# Altium PCB PCB.PcbDoc (part 2 of 2)
Units mil, origin at the board's own origin, x right, y up, seen from the top; angles counter-clockwise.
Board outline 2500 x 3180 mil, 4 copper layers (Top Layer, Mid Layer 1, Mid Layer 2, Bottom Layer), stack 61.811 mil thick; 134 components, 109 nets, 471 pads, 126 vias.
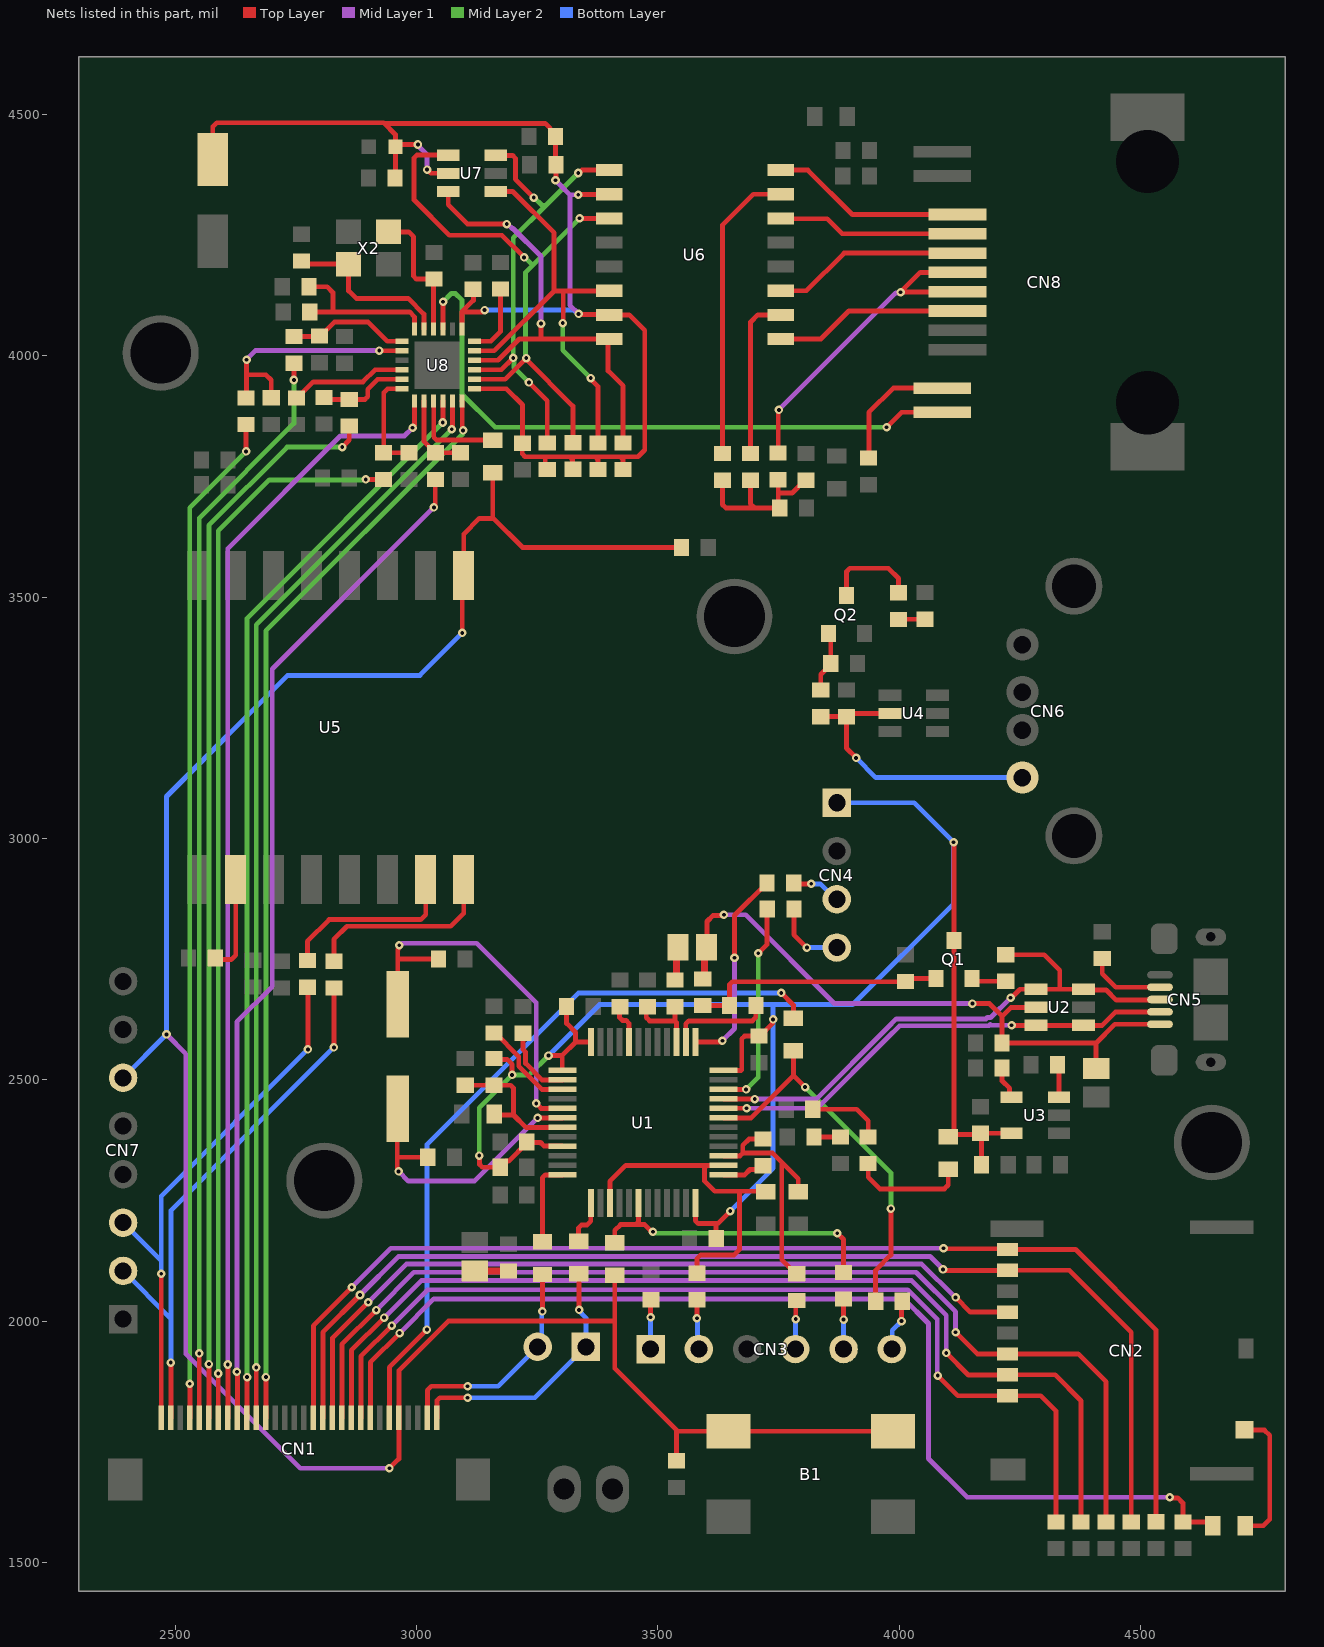
[diagram p4: the nets of this part, all layers, seen from the top]

## Via types
v1: diameter 17.72, hole 7.87, Top Layer to Bottom Layer, 123 vias
v2: diameter 25.98, hole 12.99, Top Layer to Bottom Layer, 2 vias
v3: diameter 50, hole 28, Top Layer to Bottom Layer, 1 vias

## Nets (pads, with @x,y where several pads share a name; then routed paths per layer and width w, separated by ;. In a path a pad name is that pad's centre, name@x,y a point inside that pad or via, vN(x,y) a via of type N, cw(c..) or ccw(c..) an arc to the next point about the centre after c; other vN are vias at no path point) (continued)
NetC4_1: C4.1 U3.3 | length 68.5
  Top Layer w10: C4.1@4328.56,2531.16 4331.52,2528.19 U3.3@4331.52,2463.93
NetC5_2: C5.2 U3.4 | length 68.9
  Top Layer w10: C5.2@4213.56,2524.75 4213.56,2497.44 4229,2482 4229,2468.03 U3.4@4233.1,2463.93
NetC8_1: C8.1 U1.5 X1.2 | length 811.4
  Top Layer w10: X1.2@2961,2656.41 2961,2769.87 2962.9,2771.78 2962.9,2777.23 v1(2964.38,2778.71) ; 2962.09,2750 C8.1@3045.44,2750 ; v1(3248.09,2451) 3258.33,2440.76 U1.5@3302.82,2440.76
  Mid Layer 1 w10: v1(2964.38,2778.71) 2966.47,2778.71 2970.76,2783 3125,2783 3248.09,2659.91 v1(3248.09,2451)
NetC9_2: C9.2 R12.1 SB2.2 U1.7 | length 311.5
  Top Layer w10: C9.2@3101,2488.73 R12.1@3161,2488.73 3195.14,2488.73 3201,2482.88 3201,2427 ; SB2.2@3161.08,2429.14 3163.22,2427 3201,2427 ; U1.7@3302.82,2401.39 3226.61,2401.39 3201,2427
NetC10_1: C10.1 U1.6 X1.1 | length 597.6
  Top Layer w10: X1.1@2961,2439.88 2960,2438.88 2960,2340 ; v1(2962.83,2310.17) 2960,2313 2960,2340 ; C10.1@3023.44,2339.4 2960.6,2339.4 2960,2340 ; v1(3251.01,2421.08) U1.6@3302.82,2421.08
  Mid Layer 1 w10: v1(2962.83,2310.17) 2983,2290 3119.94,2290 v1(3251.01,2421.08)
NetC18_2: C18.2 U8.4 X2.3 | length 286.3
  Top Layer w10: X2.3@2942,4257 2984,4257 2994,4247 2994,4164.86 2999.86,4159 C18.2@3036,4159 3035.16,4158.16 U8.4@3035.16,4055.8
NetC19_2: C19.2 U8.5 X2.1 | length 362.4
  Top Layer w10: C19.2@2762,4196.88 2768.81,4190.07 X2.1@2859.32,4190.07 2859.32,4134.68 2875,4119 2983,4119 3015.47,4086.53 U8.5@3015.47,4055.8
NetC20_1: C20.1 C21.1 U8.6 | length 341.3
  Top Layer w10: C20.1@2777,4143.25 2814.75,4143.25 2827,4131 2827,4091 ; C21.1@2779,4091 2827,4091 ; U8.6@2995.79,4055.8 2995.79,4081.21 2986,4091 2827,4091
NetC23_1: C23.1 C24.1 C25.1 C26.1 C27.1 C28.2 L1.1 R53.2 R54.2 R55.2 R56.2 U6.2 U6.7 U7.5 U8.1 U8.19 | length 2877.3
  Top Layer w10: C25.1@2578,4406.65 2578,4475 2586,4483 2932,4483 2956.5,4458.5 L1.1@2956.5,4433 ; 2933.28,4481.72 3266.91,4481.72 3277.25,4471.37 3277.25,4465.75 C26.1@3288,4455 3288,4397 C27.1@3289,4396 3289,4365 v1(3288,4364) ; C28.2@2955.56,4369 2956.5,4369.94 L1.1@2956.5,4433 ; v1(3003,4438) 2961.5,4438 L1.1@2956.5,4433 ; v1(3022,4386) 3029.5,4378.5 3065.29,4378.5 U7.5@3065.79,4378 ; U8.1@3094.21,4055.8 3094.21,4091.21 ; C23.1@3117,4138 3118,4137 3118,4115 3094.21,4091.21 ; U8.19@3119.8,3931.79 3186.21,3931.79 3219.75,3898.25 C24.1@3219.75,3819 3219,3818.25 3219,3796.86 3224.86,3791 3265.14,3791 ; v1(3141,4095) 3137.21,4091.21 3094.21,4091.21 ; R56.2@3271,3764.44 3266.81,3768.63 3266.81,3789.33 3265.14,3791 ; R55.2@3324,3764.88 3323,3765.88 3323,3785.14 3317.14,3791 ; v1(3335,4334) 3335.5,4334.5 3398.94,4334.5 U6.2@3399.44,4335 ; v1(3336,4087) 3337,4086 3398.44,4086 U6.7@3399.44,4085 3441,4085 3473,4053 3473,3805 3459,3791 3422.14,3791 ; R54.2@3376,3764.44 3376,3785.14 3370.14,3791 ; R53.2@3428,3764.44 3428,3785.14 3422.14,3791 ; 3265.14,3791 3317.14,3791 ; 3317.14,3791 3370.14,3791 ; 3370.14,3791 3422.14,3791
  Mid Layer 1 w10: v1(3003,4438) 3003,4435.91 3022,4416.91 v1(3022,4386) ; v1(3288,4364) 3318,4334 ; v1(3335,4334) 3318,4334 ; v1(3336,4087) 3318,4105 3318,4334
  Bottom Layer w10: v1(3141,4095) 3325.91,4095 3333.91,4087 v1(3336,4087)
NetC29_2: C29.2 R57.1 R58.1 R59.1 R60.1 | length 361.6
  Top Layer w10: R58.1@3634,3742.44 3634,3692 3641,3685 3701,3685 ; R57.1@3692.25,3742.44 3692,3742.19 3692,3694 3701,3685 ; R59.1@3749.51,3743.44 3749.51,3715.91 ; R60.1@3806.76,3742.44 3804.79,3742.44 3778.26,3715.91 3749.51,3715.91 ; 3701,3685 C29.2@3752.88,3685 3749.51,3688.37 3749.51,3715.91
NetCN2_DSW1: CN2.DSW1 SB1.1 | length 286.8
  Top Layer w10: CN2.DSW1@4715.69,1774.83 4716.51,1774 4757,1774 4768,1763 4768,1589 4755,1576 SB1.1@4717.75,1576
NetCN3_1: CN3.1 R20.2 | length 103.8
  Top Layer w10: v1(3485,2008) 3485,2043 R20.2@3486,2044
  Bottom Layer w10: CN3.1@3485,1942 3485,1949 v1(3485,2008) ; CN3.1@3486,1949 CN3.1@3487,1948
NetCN3_2: CN3.2 R19.2 | length 109.3
  Top Layer w10: v1(3581,2006) R19.2@3581,2044 R19.2@3584,2041
  Bottom Layer w10: v1(3581,2006) 3582.48,2004.52 3582.48,1949 3582.48,1944.52 CN3.2@3585,1942 ; CN3.2@3586,1949 CN3.2@3587,1948
NetCN3_4: CN3.4 R21.2 | length 102.1
  Top Layer w10: v1(3786,2004) 3786,2040.88 R21.2@3788,2042.88
  Bottom Layer w10: CN3.4@3785,1942 3785.5,1942.5 3785.5,2003.5 v1(3786,2004)
NetCN3_5: CN3.5 R22.2 | length 103.4
  Top Layer w10: v1(3885,2003) R22.2@3885,2045.44
  Bottom Layer w10: CN3.5@3885,1942 v1(3885,2003)
NetCN3_6: CN3.6 R23.2 | length 107.9
  Top Layer w10: v1(4005,2000) 4005,2039.44 R23.2@4006.56,2041
  Bottom Layer w10: CN3.6@3985,1942 3985.67,1942.67 3985.67,1980.67 v1(4005,2000)
NetCN4_3: CN4.3 R24.2 | length 104.4
  Top Layer w10: R24.2@3781.56,2908 3783.56,2906 v1(3818,2906)
  Bottom Layer w10: v1(3818,2906) 3837,2906 3870,2873 CN4.3@3871,2874
NetCN4_4: CN4.4 R25.2 | length 153.1
  Top Layer w10: R25.2@3782.12,2854 3782.12,2800.88 v1(3809,2774)
  Bottom Layer w10: v1(3809,2774) CN4.4@3871,2774
NetCN5_4: CN5.4 R30.2 | length 162.8
  Top Layer w10: R30.2@4421,2751.44 4421,2720 4449.17,2691.83 CN5.4@4540.69,2691.83
NetCN8_4: CN8.4 CN8.5 R59.2 | length 695.7
  Top Layer w10: R59.2@3749.51,3798.56 3749.51,3886.51 v1(3751,3888) ; v1(4003,4132) v1@4003.5,4132.5 ; CN8.5@4120.96,4133 4120.46,4132.5 v1@4003.5,4132.5 ; CN8.4@4120.96,4173 4044,4173 v1@4003.5,4132.5
  Mid Layer 1 w10: v1(3751,3888) 3993.52,4130.52 4001.52,4130.52 v1(4003,4132)
NetD2_2: D2.2 R7.1 | length 70
  Top Layer w15: R7.1@3535.9,2706.56 3538.69,2709.34 3538.69,2771.46 D2.2@3541.47,2774.25
NetD3_1: D3.1 SB5.1 | length 240.2
  Top Layer w10: D3.1@3936,2326.44 3936,2298 3960,2274 4094,2274 4102,2282 SB5.1@4102,2314.5
NetD3_2: D3.2 R17.1 | length 158.3
  Top Layer w10: R17.1@3821.12,2439 3912,2439 3936,2415 D3.2@3936,2381.56
NetD4_1: D4.1 R16.1 | length 55.4
  Top Layer w10: R16.1@3823.46,2381.75 3823.65,2381.56 D4.1@3878.75,2381.56
NetD5_2: D5.2 R18.2 | length 70
  Top Layer w15: D5.2@3121,2104 3121.06,2103.94 3190.94,2103.94 R18.2@3191,2103.88
NetD6_1: D6.1 R31.1 | length 55.5
  Top Layer w10: D6.1@3998.75,3453.88 3999.3,3454.44 R31.1@4054,3454.44
NetD6_2: D6.2 Q2.3 | length 199.1
  Top Layer w10: Q2.3@3891,3503.37 3891,3553 3898,3560 3978,3560 3998.75,3539.25 D6.2@3998.75,3509
NetQ1_1: Q1.1 R26.2 R27.1 R28.2 | length 531.5
  Top Layer w10: R27.1@3593.16,2654 R26.2@3648.44,2654 3648.44,2697.14 3654.3,2703 4012.12,2703 R28.2@4013,2703.88 4019.12,2710 Q1.1@4076.2,2710
NetQ1_2: Q1.2 R29.1 | length 72.5
  Top Layer w10: Q1.2@4151,2710 4157,2704 R29.1@4221,2704
NetQ2_1: Q2.1 R32.1 R33.2 | length 127.6
  Top Layer w10: R32.1@3837.75,3307.56 3837.75,3339.79 3858.44,3360.49 R33.2@3858.44,3362.45 3858.44,3419.79 Q2.1@3853.6,3424.63
NetR7_2: R7.2 R8.1 U1.39 | length 161.2
  Top Layer w10: R8.1@3478.65,2651.44 3476,2648.79 3476,2629 3483,2622 3535,2622 3535.9,2621.1 ; R7.2@3535.9,2651.44 3535.9,2621.1 ; U1.39@3538.57,2578.08 3538.57,2618.43 3535.9,2621.1
NetR9_1: R9.1 U1.44 | length 85.8
  Top Layer w10: R9.1@3421.39,2651.44 3421,2651.05 3421,2628.86 3426.86,2623 3434.29,2623 3440.15,2617.14 U1.44@3440.15,2578.08
NetR10_1: R10.1 U1.2 | length 155.7
  Top Layer w10: R10.1@3221,2596.56 3221,2562.31 3226,2557.31 3226,2533.8 3259.98,2499.82 U1.2@3302.82,2499.82
NetR11_2: R11.2 U1.3 | length 202.1
  Top Layer w10: R11.2@3161,2597.17 3162.97,2597.17 3212,2548.14 3212,2528 3259.87,2480.13 U1.3@3302.82,2480.13
NetR36_1: R36.1 U5.10 | length 204.2
  Top Layer w10: R36.1@2583,2752 2586,2749 2616,2749 2625.35,2758.35 U5.10@2625.35,2915.04
NetR39_2: R39.2 U5.15 | length 380.8
  Top Layer w10: R39.2@2774,2747 2774,2787 2819,2832 3009,2832 3019.06,2842.06 U5.15@3019.06,2915.04
NetR40_2: R40.2 U5.16 | length 412.4
  Top Layer w10: R40.2@2833,2749.56 R40.2@2829,2745.56 2829,2791 2856,2818 3071,2818 3097.8,2844.8 U5.16@3097.8,2915.04
NetR41_1: R41.1 R44.1 U8.8 | length 504.2
  Top Layer w10: R44.1@2646.73,3913 2648,3914.27 2648,3964 ; v1(2648,3992.14) 2648,3964 ; R41.1@2698.98,3913.12 2698.98,3950.02 2688,3961 2651,3961 2648,3964 ; v1(2923,4011) 2923.24,4010.76 2969.96,4010.76 U8.8@2970.2,4010.53
  Mid Layer 1 w10: v1(2648,3992.14) 2648,3993.26 2665.74,4011 v1(2923,4011)
NetR42_1: R42.1 R45.1 U8.7 | length 252.6
  Top Layer w10: R45.1@2746.49,4040 2797.75,4040 R42.1@2798.75,4041 2800.71,4041 2829.71,4070 2900,4070 2939.79,4030.21 U8.7@2970.2,4030.21
NetR43_1: R43.1 R47.1 U8.11 | length 189.7
  Top Layer w10: R43.1@2808.49,3913.7 2812.49,3909.7 R47.1@2860.75,3909.7 2893.14,3909.7 2899,3915.55 2899,3931 2919.47,3951.47 U8.11@2970.2,3951.47
NetR46_1: R46.1 U8.10 | length 243
  Top Layer w10: R46.1@2751.24,3913 2753.21,3913 2786.21,3946 2889,3946 2914.16,3971.16 U8.10@2970.2,3971.16
NetR48_1: R48.1 R49.1 U8.12 | length 218.6
  Top Layer w10: U8.12@2970.2,3931.79 2969.98,3932 2940,3932 2932,3924 R48.1@2932,3799.26 R49.1@2984.25,3799.26
NetR50_1: R50.1 R51.1 U8.14 | length 170.1
  Top Layer w10: U8.14@3015.47,3906.2 3015.47,3822.79 3026.28,3811.98 3026.28,3810.01 3037.03,3799.26 R50.1@3039,3799.26 R51.1@3091.25,3799.26
NetR52_2: R52.2 U8.24 | length 150.8
  Top Layer w10: U8.24@3119.8,4030.21 3154.21,4030.21 3174,4050 R52.2@3174,4138.44
NetR57_2: R57.2 U6.10 | length 341.1
  Top Layer w10: R57.2@3692.25,3797.56 3692.25,4070.25 3707,4085 U6.10@3754.56,4085
NetR58_2: R58.2 U6.15 | length 620.5
  Top Layer w10: R58.2@3634,3797.56 3634,4271 3698,4335 U6.15@3754.56,4335
NetSB3_2: SB3.2 U1.12 | length 177.2
  Top Layer w10: SB3.2@3261,2164.06 3261,2296.92 3266.86,2302.78 3302.64,2302.78 U1.12@3302.82,2302.97
NetSB4_2: SB4.2 U1.13 | length 96.1
  Top Layer w10: SB4.2@3336,2165.31 3336,2193.14 3341.86,2199 3353,2199 3361,2207 3361,2243.98 U1.13@3361.41,2244.38
NetSB12_2: SB12.2 U8.15 | length 199.8
  Top Layer w10: U8.15@3035.16,3906.2 3035.67,3905.69 3035.67,3831.36 3041.53,3825.5 SB12.2@3158,3825.5
NRST: B1.2 B1.3 C1.1 CN1.5 CN7.6 R34.1 SB8.2 SB12.1 U5.1 | length 4950.4
  Top Layer w10: v1(2944,1695) 2963.43,1714.43 CN1.5@2963.43,1799.4 2963.43,1897.43 3066,2000 3411,2000 ; v1(3095,3426) 3095,3542.17 U5.1@3097.8,3544.96 3097.8,3630.8 3130.35,3663.35 3156.35,3663.35 3158,3665 ; SB12.1@3158,3758 3158,3665 ; SB8.2@3411,2095.25 3411,2000 ; C1.1@3539,1710.56 3539,1774 ; R34.1@3549.44,3603 3220,3603 3158,3665 ; B1.3@3987.28,1771.58 B1.2@3646.72,1771.58 3541.42,1771.58 3539,1774 ; 3411,2000 3411,1902 3539,1774
  Mid Layer 1 w10: v1(2482,2594) 2522,2554 2522,1932 2759,1695 v1(2944,1695)
  Bottom Layer w10: CN7.6@2392,2504 v1(2482,2594) 2482,3087 2733,3338 3007,3338 v1(3095,3426)
RD_N: R53.1 U6.8 U7.6 U8.22 | length 962.8
  Top Layer w10: U7.6@3065.79,4340.6 3065.79,4313.21 3106,4273 v1(3187,4273) ; U8.22@3119.8,3990.84 3168.84,3990.84 3213,4035 3260,4035 ; v1(3258,4067) 3258,4037 3260,4035 ; U6.8@3399.44,4035 U6.8@3399,4034.56 ; R53.1@3428,3819.56 3428,3938 3397,3969 3397,4032.56 U6.8@3399,4034.56 ; 3260,4035 3398.56,4035 U6.8@3399,4034.56
  Mid Layer 1 w10: v1(3187,4273) 3189.09,4273 3198.09,4264 3200,4264 3258,4206 v1(3258,4067)
RD_P: R54.1 U6.6 U7.1 U8.23 | length 953.6
  Top Layer w10: U8.23@3119.8,4010.53 3161.2,4010.53 3285.06,4134.39 ; U7.1@3164.21,4340.6 3199.4,4340.6 3285.06,4254.94 3285.06,4134.39 ; v1(3303,4068) 3304,4069 3304,4134.39 ; v1(3361,3954) 3361,3951.91 3376,3936.91 R54.1@3376,3819.56 ; U6.6@3399.44,4135 3399.14,4134.69 3350.49,4134.69 3350.19,4134.39 3304,4134.39 ; 3285.06,4134.39 3304,4134.39
  Mid Layer 2 w10: v1(3303,4068) 3303,4012 v1(3361,3954)
RMII_CRS_DV: CN1.25 R47.2 | length 2242.5
  Top Layer w10: CN1.25@2569.72,1799.4 2569.78,1799.45 v1(2569.83,1910.83) v1(2569.83,1910.83) ; v1(2846,3811) 2860.75,3825.75 R47.2@2860.75,3854.58
  Mid Layer 2 w10: v1(2569.83,1910.83) 2569.83,3648.83 2732,3811 v1(2846,3811)
RMII_MDC: CN1.23 U8.13 | length 2344.8
  Top Layer w10: v1(2609,1910) 2609.09,1909.91 CN1.23@2609.09,1799.4 ; v1(2992,3851) 2992,3853.09 2995.79,3856.88 U8.13@2995.79,3906.2
  Mid Layer 1 w10: v1(2609,1910) 2609,3600.67 2842.33,3834 2975,3834 v1(2992,3851)
RMII_MDIO: CN1.24 R48.2 | length 2224.9
  Top Layer w10: v1(2589.33,1891.33) 2589.37,1891.3 CN1.24@2589.41,1799.4 CN1.24@2589.41,1799.4 ; v1(2895,3744) 2931.86,3744 R48.2@2932,3744.14
  Mid Layer 2 w10: v1(2589.33,1891.33) 2589.33,3637.33 2695,3743 2894,3743 v1(2895,3744)
RMII_REF_CLK: CN1.22 R50.2 | length 2115.4
  Top Layer w10: v1(2628,1895) 2628.78,1894.22 CN1.22@2628.78,1799.4 ; v1(3036,3686) 3036,3688.09 3039,3691.09 R50.2@3039,3744.14
  Mid Layer 1 w10: v1(2628,1895) 2627.89,1895.11 2627.89,2619.89 2701.14,2693.14 2701.14,3351.14 v1(3036,3686)
RMII_RXD0: CN1.27 R44.2 | length 2107.2
  Top Layer w10: v1(2530,1870) 2530.35,1869.65 CN1.27@2530.35,1799.4 ; R44.2@2646.73,3857.88 2647,3857.61 v1(2647,3802)
  Mid Layer 2 w10: v1(2530,1870) 2530,3685 v1(2647,3802)
RMII_RXD1: CN1.26 R45.2 | length 2266.9
  Top Layer w10: CN1.26@2550.04,1799.4 v1(2550,1933) ; v1(2746,3950) 2746,3984.39 R45.2@2746.49,3984.88
  Mid Layer 2 w10: v1(2550,1933) 2550,3664 2746,3860 v1(2746,3950)
RMII_TX_EN: CN1.21 U8.16 | length 2275.1
  Top Layer w10: CN1.21@2648.46,1799.4 2648.73,1799.67 2648.73,1883.73 v1(2649,1884) ; v1(3054.53,3862) 3054.69,3862.16 3054.69,3906.04 U8.16@3054.84,3906.2
  Mid Layer 2 w10: v1(2649,1884) 2649,3456.47 v1(3054.53,3862)
RMII_TXD0: CN1.20 U8.17 | length 2275.3
  Top Layer w10: v1(2668,1904) 2668.07,1903.93 2668.07,1799.47 CN1.20@2668.15,1799.4 ; v1(3073,3848) 3073,3850.09 3074.53,3851.62 U8.17@3074.53,3906.2
  Mid Layer 2 w10: v1(2668,1904) 2668,3443 v1(3073,3848)
RMII_TXD1: CN1.19 U8.18 | length 2277.1
  Top Layer w10: CN1.19@2687.83,1799.4 2687.92,1799.48 2687.92,1883.92 v1(2688,1884) ; U8.18@3094.21,3906.2 3094.72,3905.69 3094.72,3847.33 v1(3096.57,3845.49)
  Mid Layer 2 w10: v1(2688,1884) 2688,3430 3095.09,3837.09 3095.09,3844.02 v1(3096.57,3845.49)
RX: CN1.2 SB3.1 W1.2 | length 477.1
  Top Layer w10: CN1.2@3022.48,1799.4 3022.48,1856.48 3031,1865 v1(3106,1865) ; v1(3261,2020) SB3.1@3261,2096.56
  Bottom Layer w10: v1(3106,1865) 3169.44,1865 W1.2@3251,1946.56 3259.52,1955.08 3259.52,2018.52 v1(3261,2020)
RX_N: CN8.6 U6.9 | length 390.4
  Top Layer w10: U6.9@3754.56,4035 3838,4035 3896,4093 CN8.6@4120.96,4093
RX_P: CN8.3 U6.11 | length 398.7
  Top Layer w10: U6.11@3754.56,4135 3808,4135 3886,4213 CN8.3@4120.96,4213
RXD0: CN1.30 CN7.3 R39.1 | length 1130.7
  Top Layer w10: v1(2471,2098) 2471,1799.7 CN1.30@2471.3,1799.4 ; R39.1@2774,2691.88 2775,2690.88 v1(2775,2563)
  Bottom Layer w10: CN7.3@2392,2204 2471,2125 ; v1(2471,2098) 2471,2125 ; v1(2775,2563) 2471,2259 2471,2125
STLINK_3V3: C6.2 C7.1 C11.2 C12.2 C13.2 C14.2 CN4.1 Q1.3 R12.2 R13.2 SB5.2 U1.1 U1.9 U1.24 U1.36 U1.48 U3.5 | length 3777
  Top Layer w10: v1(3130,2343) 3130.86,2342.14 3130.86,2324.67 3136.72,2318.81 R13.2@3173.44,2318.81 3173.44,2320.78 3184.19,2331.53 3191.06,2331.53 3228.56,2369.03 C12.2@3228.56,2371 3229.56,2370 3257,2370 3264.07,2362.93 3301.92,2362.93 U1.9@3302.82,2362.02 ; R12.2@3161,2543.85 3162.71,2542.14 3187.86,2542.14 3198,2532 v1(3198,2510) ; v1(3273.5,2550) 3278,2550 3278.55,2550.55 3302,2550.55 ; U1.1@3302.82,2519.5 3302,2520.33 3302,2550.55 ; C14.2@3310.99,2651.56 3310.99,2616.75 3329.54,2598.2 3329.54,2578.08 ; U1.48@3361.41,2578.08 3329.54,2578.08 ; U1.24@3577.94,2244.38 3577.94,2207.86 3583.8,2202 3624,2202 v1(3650,2228) ; 3620.37,2202 3620.37,2171.66 C13.2@3621.12,2170.91 ; U1.36@3636.53,2519.5 3636.65,2519.38 3672.8,2519.38 3674,2520.58 3674,2584.7 3679.86,2590.56 C11.2@3710,2590.56 3711.97,2590.56 3737.52,2616.11 3737.52,2623.52 v1(3739,2625) ; v1(4113,2992) 4113.6,2991.4 Q1.3@4113.6,2788.74 4113.6,2393 SB5.2@4107.04,2386.44 ; C7.1@4170.88,2324 4170.88,2381.56 C6.2@4166,2386.44 ; U3.5@4233.1,2389.13 C6.2@4168.69,2389.13 C6.2@4166,2386.44 ; 3302,2550.55 3329.54,2578.08 ; SB5.2@4107.04,2386.44 4102.6,2382 SB5.2@4102,2382 4106.44,2386.44 SB5.2@4107.04,2386.44 ; SB5.2@4107.04,2386.44 C6.2@4166,2386.44
  Mid Layer 2 w10: v1(3130,2343) 3130,2442 v1(3198,2510) 3233.5,2510 v1(3273.5,2550)
  Bottom Layer w10: v1(3273.5,2550) 3379.5,2656 3739,2656 ; v1(3650,2228) 3739,2317 v1(3739,2625) 3739,2656 ; CN4.1@3871,3074 4031,3074 v1(4113,2992) 4113,2865 3904,2656 3739,2656
STLINK_N: CN5.2 U1.32 U2.1 U2.6 | length 990.9
  Top Layer w10: U1.32@3636.53,2440.76 3636.64,2440.88 3683.88,2440.88 v1(3684,2441) ; v1(4233,2613) 4234.6,2613 4236.6,2615 4239.3,2612.3 4283.49,2612.3 U2.6@4283.79,2612.6 U2.1@4382.21,2612.6 4420.6,2612.6 4448.65,2640.65 CN5.2@4540.69,2640.65
  Mid Layer 1 w10: v1(3684,2441) 3830,2441 3976,2587 4001,2612 4186,2612 4189,2615 4191,2613 v1(4233,2613)
STLINK_P: CN5.3 R29.2 U1.33 U2.3 U2.4 | length 1173.2
  Top Layer w10: U1.33@3636.53,2460.45 3636.75,2460.22 3700.78,2460.22 v1(3701,2460) ; R29.2@4221,2759.12 4300.88,2759.12 4333,2727 4333,2687.4 ; v1(4231,2670) 4232.48,2671.48 4234.67,2671.48 4250.59,2687.4 U2.4@4283.79,2687.4 4333,2687.4 ; CN5.3@4540.69,2666.24 4539.59,2665.14 4516.82,2665.14 4516.68,2665 4449.85,2665 4428.85,2686 4383.61,2686 U2.3@4382.21,2687.4 4333,2687.4
  Mid Layer 1 w10: v1(3701,2460) 3828,2460 3976,2608 3994,2626 4180.2,2626 4183.2,2629 4190,2629 v1(4231,2670)
STM_JTCK: R24.1 U1.37 | length 422.6
  Top Layer w10: U1.37@3577.94,2578.08 3629,2578.08 3631.91,2581 v1(3634,2581) ; v1(3659,2753) 3659,2840.56 R24.1@3726.44,2908
  Mid Layer 1 w10: v1(3634,2581) 3659,2606 v1(3659,2753)
STM_JTMS: R25.1 U1.34 | length 461.9
  Top Layer w10: U1.34@3659.66,2480.13 U1.34@3636.53,2480.13 3636.59,2480.07 3682.93,2480.07 v1(3683,2480) ; v1(3708,2762) 3726,2780 3726,2853 R25.1@3727,2854
  Mid Layer 2 w10: v1(3683,2480) 3708,2505 v1(3708,2762)
SWO: CN1.6 SB9.2 | length 1525.7
  Top Layer w10: CN1.6@2943.74,1799.4 2943.74,1904.41 v1(3021.67,1982.33) ; v1(3756,2680) 3781,2655 SB9.2@3781,2627.75
  Bottom Layer w10: v1(3021.67,1982.33) 3021.67,2365.67 3336,2680 v1(3756,2680)
T_JRST: R22.1 SB8.1 U1.18 | length 632.4
  Top Layer w10: SB8.1@3411,2162.75 3411,2188 3423,2200 3454.14,2200 ; U1.18@3459.83,2244.38 3459.83,2221.25 3460,2221.09 3460,2205.86 3454.14,2200 ; v1(3490,2185) 3487.91,2185 3472.91,2200 3454.14,2200 ; v1(3872,2182) 3885,2169 R22.1@3885,2100.56
  Mid Layer 2 w10: v1(3490,2185) 3492.09,2185 3495.09,2182 v1(3872,2182)
T_JTCK: R19.1 SB6.1 U1.15 U1.26 | length 723.7
  Top Layer w10: U1.15@3400.78,2244.38 3400.78,2289.78 3433.65,2322.65 3602.35,2322.65 ; R19.1@3581,2099.12 3591.75,2109.87 3581,2109.87 3581,2129 3589,2137 3658,2137 3668.98,2147.98 3668.98,2269 ; U1.26@3636.53,2322.65 3602.35,2322.65 ; SB6.1@3719.97,2269 3668.98,2269 ; 3602.35,2322.65 3596.49,2316.79 3596.49,2290.51 3618,2269 3668.98,2269
T_JTMS: R15.1 R21.1 SB7.1 U1.27 | length 514.3
  Top Layer w10: U1.27@3636.53,2342.34 3670.14,2342.34 3676,2348.19 ; R15.1@3717.9,2377.02 3689.02,2377.02 3676,2364 3676,2348.19 ; R21.1@3788,2098 3786.03,2098 3757,2127.03 3757,2328.99 ; SB7.1@3791,2267.75 3791,2294.99 3757,2328.99 ; 3676,2348.19 3737.8,2348.19 3757,2328.99
T_SWDIO_IN: R15.2 U1.25 | length 89.2
  Top Layer w10: U1.25@3636.53,2302.97 3679.97,2302.97 3691.06,2314.06 3710.06,2314.06 R15.2@3717.9,2321.9
T_SWO: R23.1 SB9.1 U1.31 | length 797.1
  Top Layer w10: U1.31@3636.53,2421.08 3693.75,2421.08 3781,2508.33 ; SB9.1@3781,2560.25 3781,2508.33 ; v1(3805.19,2484.93) 3781.79,2508.33 3781,2508.33 ; R23.1@3951.44,2041 3951.44,2105.44 3983,2137 v1(3983,2233)
  Mid Layer 2 w10: v1(3805.19,2484.93) 3983,2307.12 v1(3983,2233)
TD_N: R55.1 U6.3 U7.4 U8.20 | length 1201
  Top Layer w10: U7.4@3065.79,4415.4 3065.19,4416 3000.86,4416 2995,4410.14 2995,4323 3068,4250 3177,4250 v1(3223,4204) ; U8.20@3119.8,3951.47 3183.98,3951.47 3216.16,3983.65 3216.16,3983.95 3217.74,3985.53 3217.95,3985.53 3227.33,3994.91 v1(3227.33,3995.33) ; v1@3226,3994 3324,3896 R55.1@3324,3820 ; v1(3338,4285) U6.3@3399.44,4285
  Mid Layer 2 w10: v1(3223,4204) 3224,4204 3240.5,4187.5 ; v1(3227.33,3995.33) 3226,3996.67 3226,4173 3240.5,4187.5 ; v1(3338,4285) 3240.5,4187.5
TD_P: R56.1 U6.1 U7.3 U8.21 | length 974
  Top Layer w10: U8.21@3119.8,3971.16 3175.83,3971.16 v1(3200.33,3995.67) ; U7.3@3164.21,4415.4 3199.14,4415.4 3205,4409.54 3205,4366 v1(3243,4328) ; v1(3233,3945) 3271,3907 R56.1@3271,3819.56 ; v1(3335,4379) 3337.09,4379 3343.09,4385 U6.1@3399.44,4385
  Mid Layer 2 w10: v1(3233,3945) 3201.81,3976.19 3201.81,3994.19 v1(3200.33,3995.67) 3200.33,4244.33 3267.67,4311.67 ; v1(3243,4328) 3244.08,4328 3260.41,4311.67 3267.67,4311.67 ; v1(3335,4379) 3267.67,4311.67
TX: CN1.1 SB4.1 W1.1 | length 549
  Top Layer w10: CN1.1@3042.77,1800 CN1.1@3042.17,1799.4 3042.17,1835.14 3048.02,1841 v1(3106,1841) ; SB4.1@3336,2097.81 3337,2096.81 v1(3337,2023)
  Bottom Layer w10: v1(3106,1841) 3245.44,1841 W1.1@3351,1946.56 3351,2006.91 3337,2020.91 v1(3337,2023)
TX_N: CN8.2 U6.14 | length 379.7
  Top Layer w10: U6.14@3754.56,4285 3755.56,4284 3851,4284 3882,4253 CN8.2@4120.96,4253
TX_P: CN8.1 U6.16 | length 404.5
  Top Layer w10: U6.16@3754.56,4385 3811,4385 3903,4293 CN8.1@4120.96,4293
TXD0: CN1.29 CN7.2 R40.1 | length 1171.1
  Top Layer w10: CN1.29@2490.98,1799.4 v1(2491,1914) ; v1(2829,2567) R40.1@2829,2690.44
  Bottom Layer w10: CN7.2@2392,2104 2491,2005 ; v1(2491,1914) 2491,2005 ; v1(2829,2567) 2491,2229 2491,2005
USB5V: C2.2 CN5.1 D1.1 D2.1 R27.2 U2.5 | length 1356.4
  Top Layer w10: D2.1@3596.84,2770.56 D2.1@3600.53,2774.25 3602,2775.72 3602,2828 3614.52,2840.52 3635.52,2840.52 v1(3637,2842) ; v1(4152,2658) 4187.12,2658 4213.56,2631.56 ; U2.5@4283.79,2650 4232,2650 4213.56,2631.56 ; D1.1@4408.46,2523.53 4408.08,2523.91 4408.08,2576 ; CN5.1@4540.69,2615.06 4447.14,2615.06 4408.08,2576 ; 4213.56,2631.56 C2.2@4213.56,2576 4408.08,2576
  Top Layer w15: R27.2@3593.16,2709.12 3596.84,2712.8 D2.1@3596.84,2770.56
  Mid Layer 1 w10: v1(3637,2842) 3682,2842 3866,2658 v1(4152,2658)
USB_RENUMn: R26.1 U1.38 | length 213.6
  Top Layer w10: U1.38@3558.26,2578.08 3558,2578.34 3558,2616 3564,2622 3696,2622 3703,2629 3703,2653.44 R26.1@3703.56,2654
uSD_CLK: CN1.12 CN2.P5 | length 1669.3
  Top Layer w10: CN1.12@2825.63,1799.4 2825.63,1964.63 v1(2900,2039) ; v1(4117,2049) 4147.47,2018.53 CN2.P5@4224.94,2018.53
  Mid Layer 1 w10: v1(2900,2039) 2979,2118 4047,2118 4116,2049 v1(4117,2049)
uSD_CMD: CN1.11 CN2.P3 R3.2 | length 2208.6
  Top Layer w10: CN1.11@2845.32,1799.4 2845.32,1951.66 v1(2916.53,2022.88) 2917.69,2021.72 v1@2917.74,2021.72 ; v1(4117,1977) 4162.09,1931.91 CN2.P3@4224.94,1931.91 4371.09,1931.91 4429,1874 R3.2@4429,1583.56
  Mid Layer 1 w10: v1(2916.53,2022.88) 2994.65,2101 4035,2101 4117,2019 v1(4117,1977)
uSD_D0: CN1.13 CN2.P7 R4.2 | length 2376.3
  Top Layer w10: CN1.13@2805.94,1799.4 2805.94,1977.01 v1(2882.97,2054.03) ; v1(4091,2107) 4093.09,2107 4095.09,2105 4224.8,2105 CN2.P7@4224.94,2105.14 4352.86,2105.14 4481,1977 R4.2@4481,1583.56
  Mid Layer 1 w10: v1(2882.97,2054.03) 2962.94,2134 4064,2134 v1(4091,2107)
uSD_D1: CN1.14 CN2.P8 R5.2 | length 2471.3
  Top Layer w10: CN1.14@2786.26,1799.4 2786.26,1990.26 v1(2866,2070) ; v1(4092,2151) 4093.28,2149.72 4223.66,2149.72 CN2.P8@4224.94,2148.45 4365.55,2148.45 4532.25,1981.75 R5.2@4532.25,1584
  Mid Layer 1 w10: v1(2866,2070) 2947,2151 v1(4092,2151)
uSD_D2: CN1.9 CN2.P1 R1.2 | length 2027.7
  Top Layer w10: CN1.9@2884.69,1799.4 2884.69,1926.8 v1(2948.56,1990.68) v1@2948.86,1990.39 ; v1(4080,1887) 4121.7,1845.3 CN2.P1@4224.94,1845.3 4293.7,1845.3 4325,1814 R1.2@4325,1583.56
  Mid Layer 1 w10: v1(2948.56,1990.68) 3022.88,2065 4018,2065 4079,2004 4079,1888 v1(4080,1887)
uSD_D3: CN1.10 CN2.P2 R2.2 | length 2112.4
  Top Layer w10: CN1.10@2865,1799.4 2865,1939.23 v1(2932.94,2007.17) ; v1(4097.86,1934) 4143.56,1888.3 4224.63,1888.3 CN2.P2@4224.94,1888.61 4323.39,1888.61 4377,1835 R2.2@4377,1583.56
  Mid Layer 1 w10: v1(2932.94,2007.17) 3009.77,2084 4026,2084 4097.86,2012.14 v1(4097.86,1934)
uSD_DETECT: CN1.8 R6.1 SB1.2 | length 2297.2
  Top Layer w10: CN1.8@2904.37,1799.4 2904.37,1914.37 v1(2965,1975) ; v1(4561,1635) 4562.48,1633.52 4577.48,1633.52 4588,1623 R6.1@4588,1583.56 4642.69,1583.56 SB1.2@4650.25,1576
  Mid Layer 1 w10: v1(2965,1975) 3036,2046 4010,2046 4061,1995 4061,1715 4141,1635 v1(4561,1635)
VBUS: C15.2 CN6.1 R32.2 U4.5 | length 601.6
  Top Layer w10: R32.2@3837.75,3252.44 C15.2@3891,3252.44 ; v1(3911,3167) 3891,3187 C15.2@3891,3252.44 ; U4.5@3981.34,3259 3897.56,3259 C15.2@3891,3252.44
  Bottom Layer w10: v1(3911,3167) 3951.8,3126.2 CN6.1@4255.69,3126.2
Y_A: CN8.10 U8.3 | length 1339.9
  Top Layer w10: U8.3@3054.84,4055.8 3054.99,4055.95 3054.99,4111.85 v1(3055.14,4112) ; v1(3974,3852) 4005.32,3883.32 CN8.10@4089.46,3883.32
  Mid Layer 2 w10: v1(3055.14,4112) 3072.43,4129.29 3080.71,4129.29 3094,4116 3094,3921 3163,3852 v1(3974,3852)
Y_K: CN8.9 R61.2 | length 267.9
  Top Layer w10: R61.2@3937,3788.12 3937.36,3788.48 3937.36,3882.83 3987.84,3933.32 CN8.9@4089.46,3933.32
pads on no net: CN8.MH1 CN8.MH2 U1.4 U1.11 U1.14 U1.16 U1.17 U1.19 U1.21 U1.22 U1.28 U1.29 U1.40 U1.41 U1.42 U1.43 U1.45 U1.46 U5.2 U5.4 U5.5 U5.6 U5.7 U5.13 U5.14 U6.4 U6.5 U6.12 U6.13

## Polygon pours and split planes (outlines as drawn)
GND on Top Layer "GND_L01_P000" (solid, pour order 0): 2300,1440 4800,1440 4800,4620 2300,4620
GND on Mid Layer 1 "GND_L02_P002" (solid, pour order 2): 2300,1440 4800,1440 4800,4620 2300,4620
GND on Mid Layer 2 "GND_L03_P003" (solid, pour order 3): 2300,1440 4800,1440 4800,4620 2300,4620
GND on Bottom Layer "GND_L04_P004" (solid, pour order 4): 2300,1440 4800,1440 4800,4620 2300,4620

## Silkscreen, mask and mechanical layers (free items; w line width, h text height)
Mechanical 1:
  lines w10: 2300,1440 2300,4620 3980,4620 4800,4620 4800,1440 2300,1440

## Dimensions
2300,4620 to 2300,1440 on Mechanical 1
2320,4640 to 4800,4900 on Mechanical 1